# Altium PCB ArduinoDevBoard.PcbDoc
Units mm, origin at the board's own origin, x right, y up, seen from the top; angles counter-clockwise.
Board outline 94 x 52 mm, 2 copper layers (Top Layer, Bottom Layer); 33 components, 26 nets, 114 pads, 0 vias.
Unrouted connection lines stored in the file: 4.
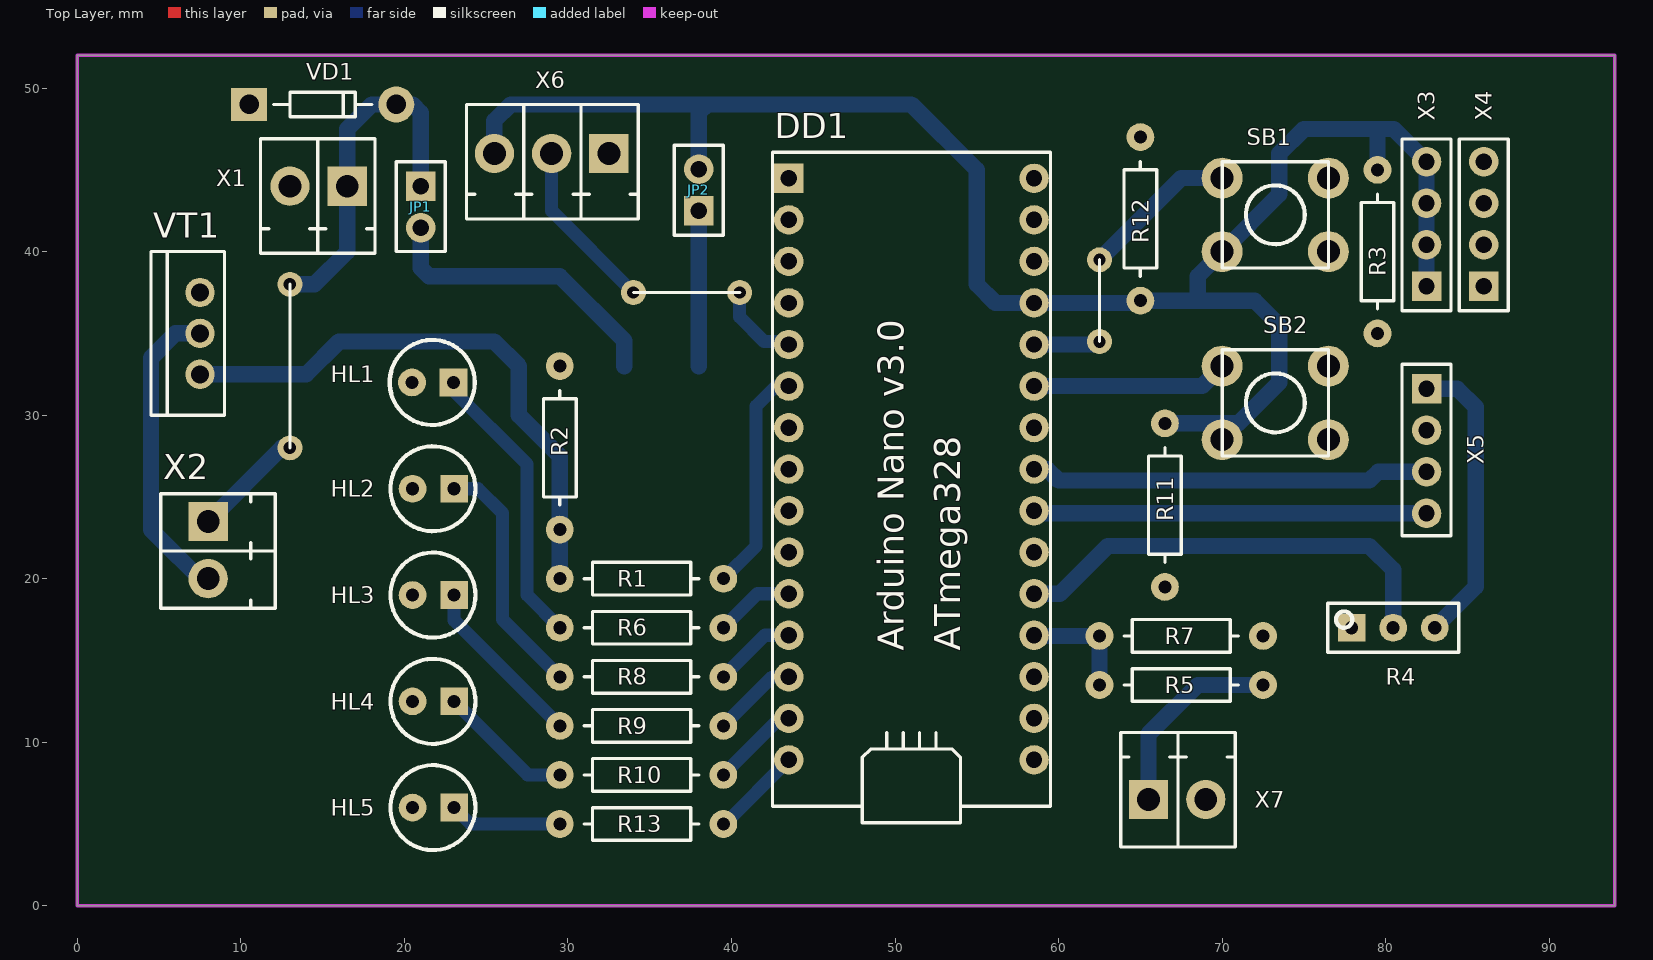
[diagram p0: Top Layer view]
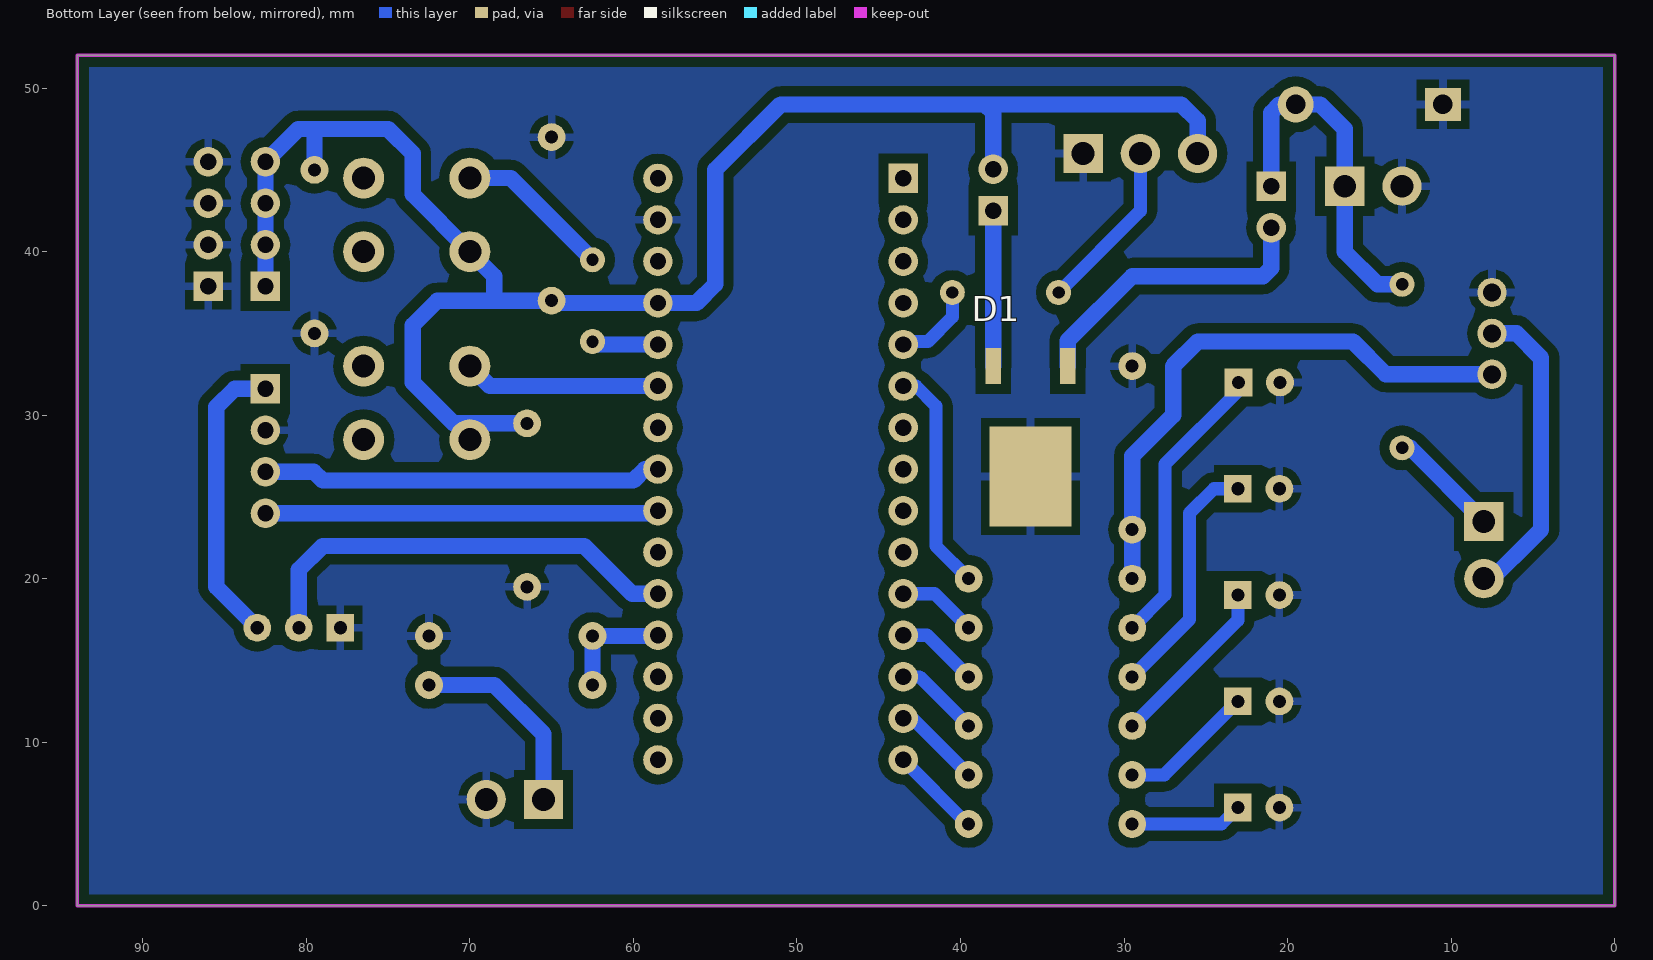
[diagram p1: Bottom Layer view, seen from below]
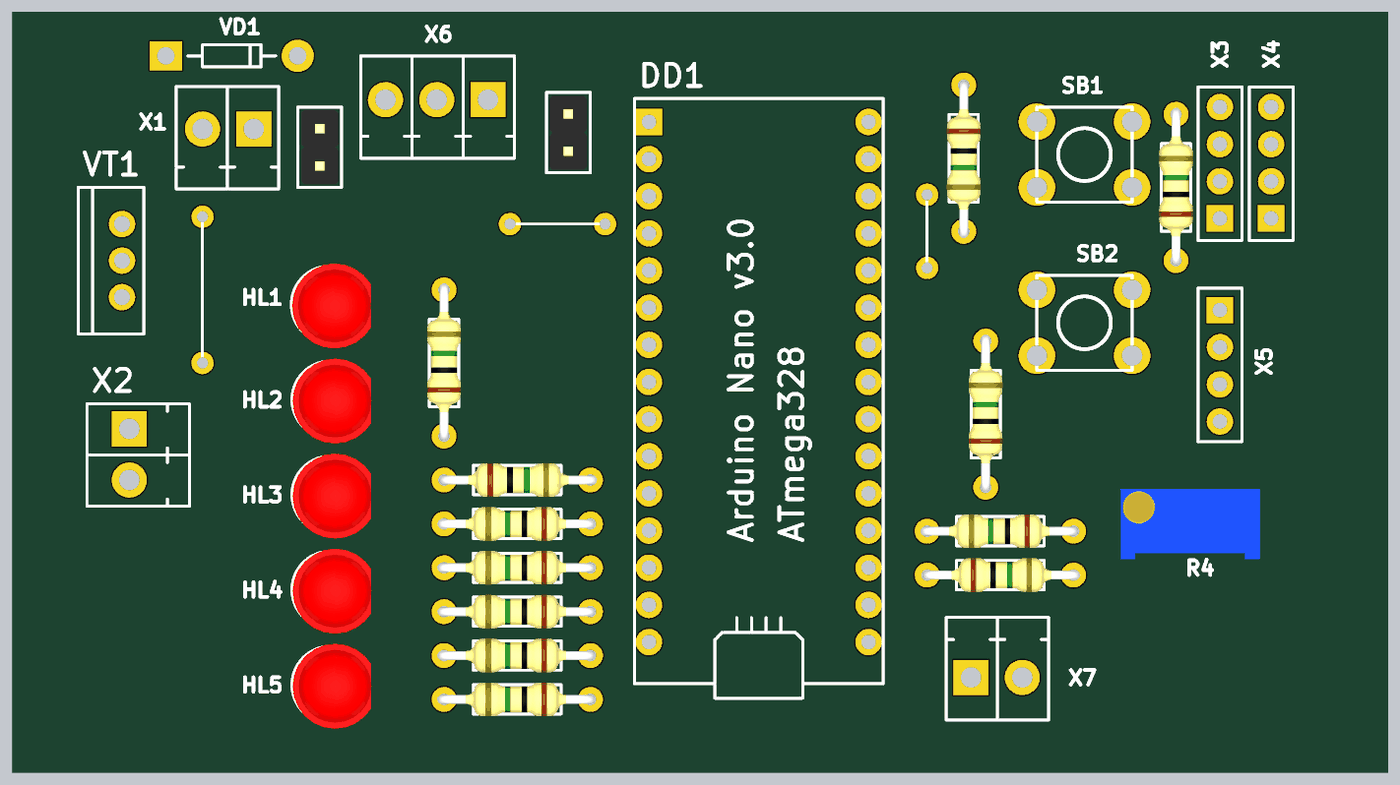
[diagram p2: 3D render of the assembled board from above, using the file's embedded part models]

## Layer stack, top to bottom
Top Solder: solder mask 0.0102, Solder Resist, Dk 3.5
Top Layer: signal copper 0.0356
Dielectric 1: dielectric 0.32, FR-4, Dk 4.8
Bottom Layer: signal copper 0.0356
Bottom Solder: solder mask 0.0102, Solder Resist, Dk 3.5

## Board outline
0,0 94,0 94,52 0,52

## Design rules (kind name [scope] priority, off if disabled: settings)
Clearance [All] p1: gap=0.6 ignorepadtopadclearanceinfootprint=FALSE
PolygonConnect [All] p1: connectstyle=Relief reliefconductorwidth=0.5 reliefentries=4 polygonreliefangle="90 Angle" airgapwidth=0.5
RoutingVias [All] p1: holewidth=0.711 width=1.27 viastyle="Through Hole" minholewidth=0.711 minwidth=1.27 maxholewidth=0.711 maxwidth=1.27
SolderMaskExpansion [All] p1: expansion=0.102
Width [All] p1: maxlimit=1.5 minlimit=0.254 preferedwidth=1 toplayer_maxwidth=0.254 toplayer_prefwidth=0.254 bottomlayer_minwidth=0.8 minimp=50.000000 maximp=50.000000 favimp=50.000000
30 further rules are at their usual default settings.

## Components (designator, comment, footprint, x,y, rotation, side; value= is the part's Value field where it differs from the comment)
D1 "L78M05" D-PAK 35.72,28.65 r270 bottom (schematic designator D?)
DD1 "ADUINO-NANO-V3.0-328" ARDUINO_NANO_V3.0 43.5,44.58 r0 top
HL1 "*" "Led Diode 5mm" 23,32 r180 top
HL2 "*" "Led Diode 5mm" 23.04,25.5 r180 top
HL3 "*" "Led Diode 5mm" 23.04,19 r180 top
HL4 "*" "Led Diode 5mm" 23.04,12.5 r180 top
HL5 "*" "Led Diode 5mm" 23.04,6 r180 top
JP1 "Jumper" PLS-2 21,44 r270 top (schematic designator Jumper1)
JP2 "Jumper" PLS-2 38,42.5 r90 top (schematic designator Jumper?)
R1 "100R" Resistor-0.25W 29.5,20 r0 top
R2 "1k" Resistor-0.25W 29.5,23 r90 top
R3 "4.7K" Resistor-0.25W 79.5,35 r90 top
R4 "*" 3296W_Resistor 80.46,17 r0 top
R5 "100K" Resistor-0.25W 62.5,13.5 r0 top
R6 "100R" Resistor-0.25W 39.5,17 r180 top
R7 "10K" Resistor-0.25W 72.5,16.5 r180 top
R8 "100R" Resistor-0.25W 39.5,14 r180 top
R9 "100R" Resistor-0.25W 39.5,11 r180 top
R10 "100R" Resistor-0.25W 39.5,8 r180 top
R11 "10k" Resistor-0.25W 66.5,19.5 r90 top
R12 "10k" Resistor-0.25W 65,47 r270 top
R13 "100R" Resistor-0.25W 39.5,5 r180 top
SB1 "*" KLS7-TS6601-5.0-180 70,44.5 r0 top
SB2 "*" KLS7-TS6601-5.0-180 70,33 r0 top
VD1 "1N4007" "Diode (DO41)" 15,49 r0 top
VT1 "TIP122" TO220 7.5,35 r270 top
X1 "*" 15EDGVC-3.5-2P 16.5,44 r180 top
X2 "*" 15EDGVC-3.5-2P 8,23.5 r270 top
X3 "*" PLS-4 82.5,37.88 r90 top
X4 "*" PLS-4 86,37.88 r90 top
X5 "*" PLS-4 82.5,31.62 r270 top
X6 "*" 15EDGVC-3.5-3P 32.5,46 r180 top
X7 "*" 15EDGVC-3.5-2P 65.5,6.5 r0 top

## Footprints (in the part's own frame and the unit in brackets; to place one, negate y for a bottom-side part, rotate by r counter-clockwise, add the part's x,y. Pads: shape width x height; smd on the part's side, far side on the other; paste and mask are expansions set on the pad)
15EDGVC-3.5-2P [mm]
  rect 2.4x2.4 hole 1.4 unplated: 1(0,0)
  round 2.4 hole 1.4: 2(3.5,0)
  silkscreen extent -1.7,-2.9 5.3,4.1
15EDGVC-3.5-3P [mm]
  rect 2.4x2.4 hole 1.4 unplated: 1(0,0)
  round 2.4 hole 1.4: 2(3.5,0) 3(7,0)
  silkscreen extent -1.8,-3 8.7,4
3296W_Resistor [mm]
  rect 1.7x1.7 hole 0.8: 1(-2.54,0)
  round 1.7 hole 0.8: 2(0,0) 3(2.54,0)
  silkscreen extent -4,-1.5 4,1.5, body extent -4.76,-2.4 4.77,2.4, height 11.55
ARDUINO_NANO_V3.0 [mm]
  rect 1.8x1.8 hole 1: 1(0,-0.1)
  round 1.8 hole 1: 2(0,-2.64) 3(0,-5.18) 4(0,-7.72) 5(0,-10.26) 6(0,-12.8) 7(0,-15.34) 8(0,-17.88) 9(0,-20.42) 10(0,-22.96) 11(0,-25.5) 12(0,-28.04) 13(0,-30.58) 14(0,-33.12) 15(0,-35.66) 16(15,-35.66) 17(15,-33.12) 18(15,-30.58) 19(15,-28.04) 20(15,-25.5) 21(15,-22.96) 22(15,-20.42) 23(15,-17.88) 24(15,-15.34) 25(15,-12.8) 26(15,-10.26) 27(15,-7.72) 28(15,-5.18) 29(15,-2.64) 30(15,-0.1)
  silkscreen extent -1,-39.5 16,1.5
D-PAK [mm] "TO-252AA"
  rect 2.2x0.95 smd: 1(-4.35,2.28) 2(-4.35,-2.28)
  rect 6.1x5 smd: 3(2.4,0)
  body extent -4.6,-3.25 5.3,3.25, height 2.5
"Diode (DO41)" [mm]
  rect 2.2x2 hole 1.2: 1(-4.5,0)
  round 2.2 hole 1.2: 2(4.5,0)
  silkscreen extent -3,-0.75 3,0.75
KLS7-TS6601-5.0-180 [mm]
  round 2.5 hole 1.4: 1(0,0) 2(6.5,0) 3(0,-4.5) 4(6.5,-4.5)
  silkscreen extent 0,-5.5 6.5,1
"Led Diode 5mm" [mm]
  rect 1.7x1.7 hole 0.8: 1(0,0)
  round 1.7 hole 0.8: 2(2.54,0)
  silkscreen extent -1.3,-2.6 3.9,2.6, body extent -1.5,-2.8 3.89,3, height 8.5
PLS-2 [mm]
  rect 1.8x1.8 hole 1: 1(0,0)
  round 1.8 hole 1: 2(2.54,0)
  silkscreen extent -1.5,-1.5 4,1.5, body extent -1.29,-1.25 3.79,1.29, height 8.54
PLS-4 [mm]
  rect 1.8x1.8 hole 1: 1(0,0)
  round 1.8 hole 1: 2(2.54,0) 3(5.08,0) 4(7.62,0)
  silkscreen extent -1.5,-1.5 9,1.5
Resistor-0.25W [mm]
  round 1.7 hole 0.8: 1(0,0) 2(10,0)
  silkscreen extent 1.5,-1 8.5,1, body extent -0.3,-1.16 10.46,1.16, height 2.93
TO220 [mm]
  round 1.8 hole 1.1: 1(2.5,0) 2(0,0) 3(-2.5,0)
  silkscreen extent -5,-3 5,1.5

## Part data
DD1: library part ARDUINO-NANO-V3.0-328
HL1 HL2 HL3 HL4 HL5: library part Led-5mm
R1 R2 R3 R5 R6 R7 R8 R9 R10 R11 R12 R13: library part "Resistor 0.25W", "=Power"
R4: library part 3296W, "3296", Case=3296W
SB1 SB2: library part KLS7-TS6601-5.0-180
VD1: "1A, 1000V"
VT1: "PNP Transistor"
X1 X2 X7: library part Connector-2Pin
X3 X4 X5: library part Connector-4Pin
X6: library part Connector-3Pin

## Free pads (board coordinates)
  round 1.524 hole 0.762: 2(62.5,39.5) 3(62.5,34.5) 4(40.5,37.5) 5(34,37.5) 6(13,28) 7(13,38)

## Nets (pads, with @x,y where several pads share a name; then routed paths per layer and width w, separated by ;. In a path a pad name is that pad's centre, name@x,y a point inside that pad or via, vN(x,y) a via of type N, cw(c..) or ccw(c..) an arc to the next point about the centre after c; other vN are vias at no path point)
+5V: DD1.27 JP2.2 R3.2 R4.3 R11.2 R12.2 SB1.3 SB2.3 X3.1 X3.2 X3.3 X3.4 X5.1 X6.3 | length 125.6
  Bottom Layer w1: X6.3 25.5,48 26.5,49 38.5,49 ; JP2.2 38,48.5 38.5,49 ; R11.2 71,29.5 73.5,32 73.5,35.5 72,37 68.5,37 ; R3.2 79.5,47.5 ; X5.1 84.38,31.62 85.5,30.5 85.5,19.5 R4.3 ; X3.1 X3.2 X3.3 X3.4 80.5,47.5 79.5,47.5 ; 38.5,49 51,49 55,45 55,38 56.14,36.86 DD1.27 64.86,36.86 R12.2 68.5,37 ; 68.5,37 68.5,38.5 SB1.3 73.5,43.5 73.5,46 75,47.5 79.5,47.5
+12V: JP1.1 pad.6 pad.7 VD1.2 X1.1 X2.1 | length 28.5
  Bottom Layer w1: X2.1 12.5,28 pad.6 ; pad.7 14.5,38 16.5,40 X1.1 16.5,47.5 18,49 VD1.2 20.5,49 21,48.5 JP1.1
GND: D1.3 DD1.29 HL1.2 HL2.2 HL3.2 HL4.2 HL5.2 R2.2 R3.1 R4.1 R7.1 R11.1 R12.1 VD1.1 VT1.3 X1.2 X4.1 X4.2 X4.3 X4.4 X5.2 X6.1 X7.2
NetD?_1: D1.1 JP1.2 | length 18.3
  Bottom Layer w1: JP1.2 21,39 21.5,38.5 29.5,38.5 33.44,34.56 D1.1
NetD?_2: D1.2 JP2.1 | length 9.5
  Bottom Layer w1: D1.2 JP2.1
NetDD1_5: DD1.5 pad.4 pad.5 X6.2 | length 15.8
  Bottom Layer w0.8: X6.2 29,42.5 pad.5 ; pad.4 40.5,36 42,34.5 43.32,34.5 DD1.5
NetDD1_6: DD1.6 R1.2 | length 13.9
  Bottom Layer w0.8: R1.2 41.5,22 41.5,30.56 42.72,31.78 DD1.6
NetDD1_11: DD1.11 R6.1 | length 4.9
  Bottom Layer w0.8: R6.1 41.58,19.08 DD1.11
NetDD1_12: DD1.12 R8.1 | length 5.1
  Bottom Layer w0.8: R8.1 42.04,16.54 DD1.12
NetDD1_13: DD1.13 R9.1 | length 5.2
  Bottom Layer w0.8: R9.1 42.5,14 DD1.13
NetDD1_14: DD1.14 R10.1 | length 5.4
  Bottom Layer w0.8: R10.1 42.96,11.46 DD1.14
NetDD1_15: DD1.15 R13.1 | length 5.6
  Bottom Layer w0.8: R13.1 39.58,5 DD1.15
NetDD1_19: DD1.19 R5.1 R7.2 | length 7
  Bottom Layer w1: DD1.19 58.54,16.5 R7.2 R5.1
NetDD1_20: DD1.20 R4.2 | length 27.3
  Bottom Layer w1: DD1.20 60.08,19.08 63,22 79,22 80.46,20.54 R4.2
NetDD1_22: DD1.22 X5.4 | length 24.1
  Bottom Layer w1: DD1.22 58.66,24 X5.4
NetDD1_23: DD1.23 X5.3 | length 24.5
  Bottom Layer w1: DD1.23 59.3,26.7 60,26 79,26 79.54,26.54 X5.3
NetDD1_25: DD1.25 SB2.1 | length 12
  Bottom Layer w1: DD1.25 68.78,31.78 SB2.1
NetDD1_26: DD1.26 pad.2 pad.3 SB1.1 | length 13.3
  Bottom Layer w1: DD1.26 pad.3@62.18,34.32 ; pad.2 67.5,44.5 SB1.1
NetHL1_1: HL1.1 R6.2 | length 17.7
  Bottom Layer w0.8: HL1.1 23,31.5 27.5,27 27.5,19 R6.2
NetHL2_1: HL2.1 R8.2 | length 15
  Bottom Layer w0.8: HL2.1 24.5,25.5 26,24 26,17.5 R8.2
NetHL3_1: HL3.1 R9.2 | length 10.7
  Bottom Layer w0.8: HL3.1 23.04,17.46 R9.2
NetHL4_1: HL4.1 R10.2 | length 8.3
  Bottom Layer w0.8: HL4.1 27.54,8 R10.2
NetHL5_1: HL5.1 R13.2 | length 6.9
  Bottom Layer w0.8: HL5.1 24.04,5 R13.2
NetR1_1: R1.1 R2.1 VT1.1 | length 35
  Bottom Layer w1: VT1.1 14,32.5 16,34.5 25.5,34.5 27,33 27,30 29.5,27.5 R2.1 R1.1
NetR5_2: R5.2 X7.1 | length 12.2
  Bottom Layer w1: X7.1 65.5,10.5 68.5,13.5 R5.2
NetVT1_C: VT1.2 X2.2 | length 19.1
  Bottom Layer w1: VT1.2 6,35 4.5,33.5 4.5,23 X2.2@8,19.5
pads on no net: DD1.1 DD1.2 DD1.3 DD1.4 DD1.7 DD1.8 DD1.9 DD1.10 DD1.16 DD1.17 DD1.18 DD1.21 DD1.24 DD1.28 DD1.30 SB1.2 SB1.4 SB2.2 SB2.4

## Polygon pours and split planes (outlines as drawn)
GND on Bottom Layer "GND" (solid, pour order 18): 0,52 0,0 94,0 94,52

## Keep-outs
Keep-Out Layer:
  the board outline again, w0.2

## Silkscreen, mask and mechanical layers (free items; w line width, h text height)
Top Overlay:
  lines w0.2: 13,28 13,38 ; 34,37.5 40.5,37.5 ; 62.5,34.5 62.5,39.5
Border:
  the board outline again, w0.254

## Dimensions
0,52 to 94,52.5 on Size
0,0 to 0,52 on Size

## Text inside footprints (layer, text, board x,y; h text height)
DD1: Top Overlay "Arduino Nano v3.0" at 50.539,15.58 h1.59 r90; Top Overlay "ATmega328" at 54,15.58 h1.59 r90